# EAGLE board WS2811_Extender_V1.1_X12 (EAGLE 9.5.2), part 1 of 3
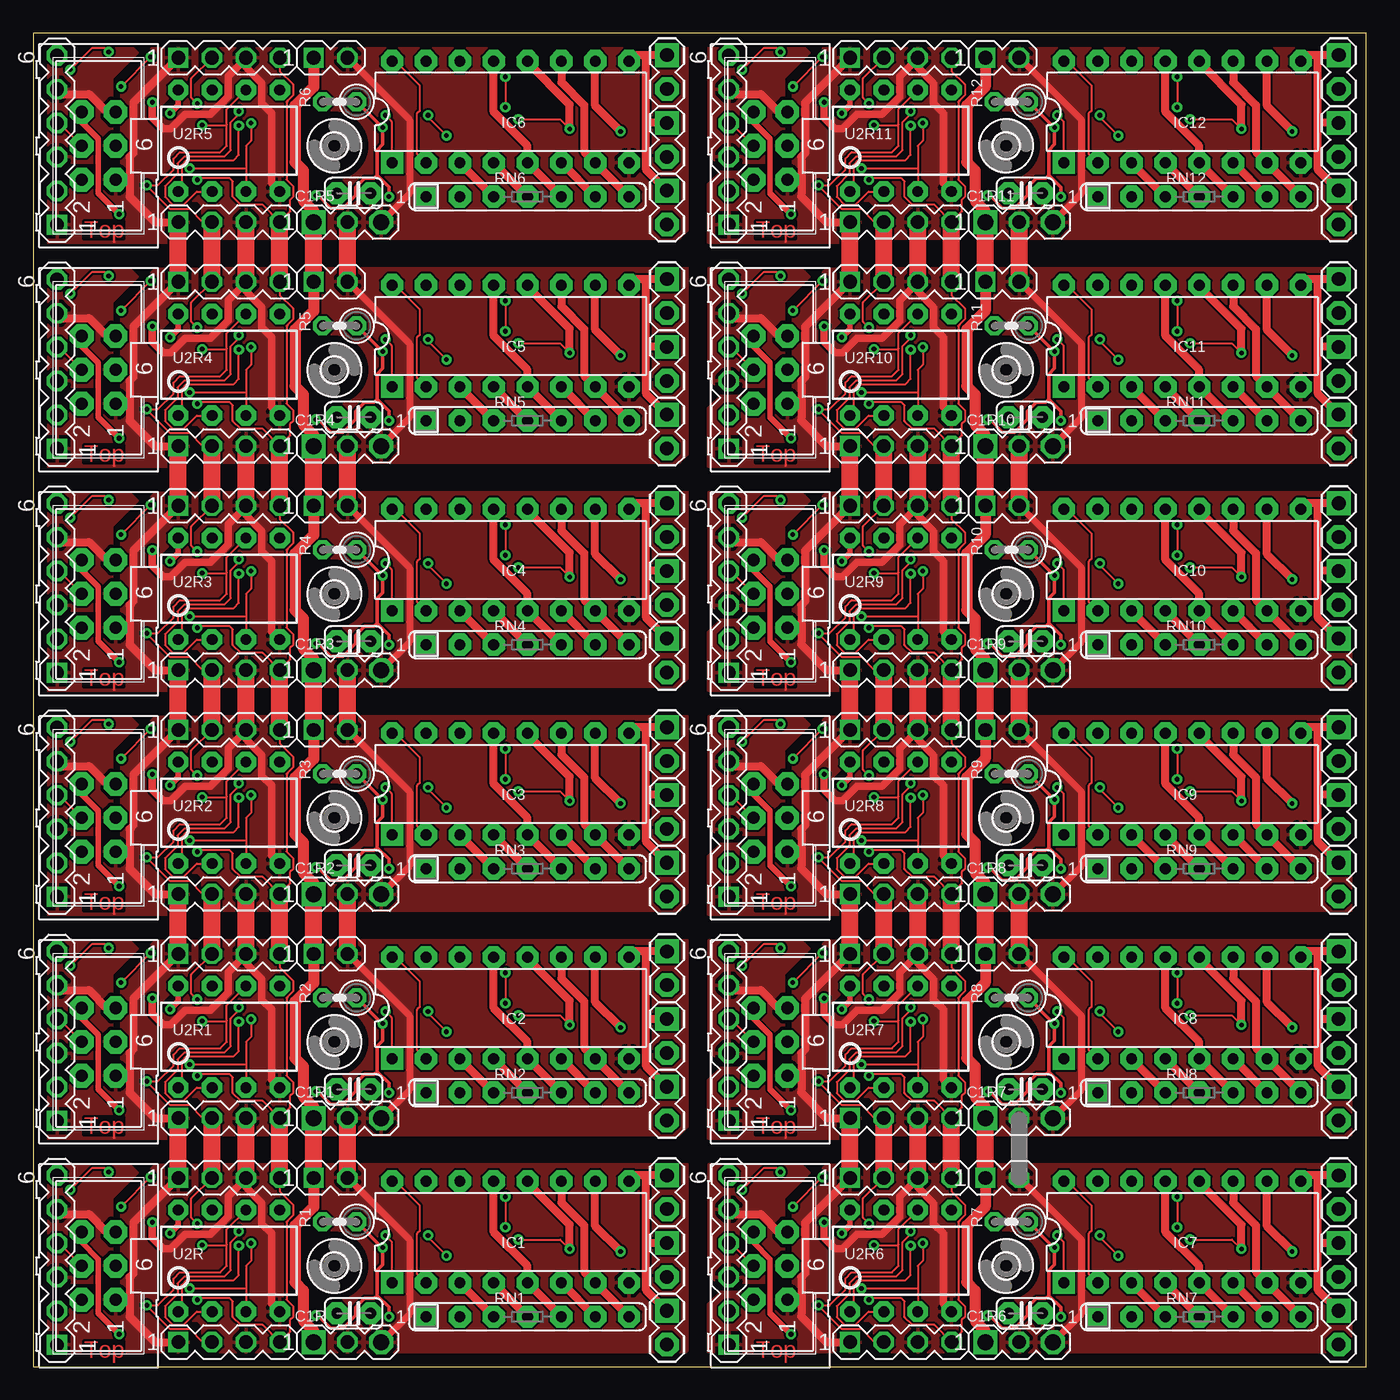
[diagram p0: board, top side]
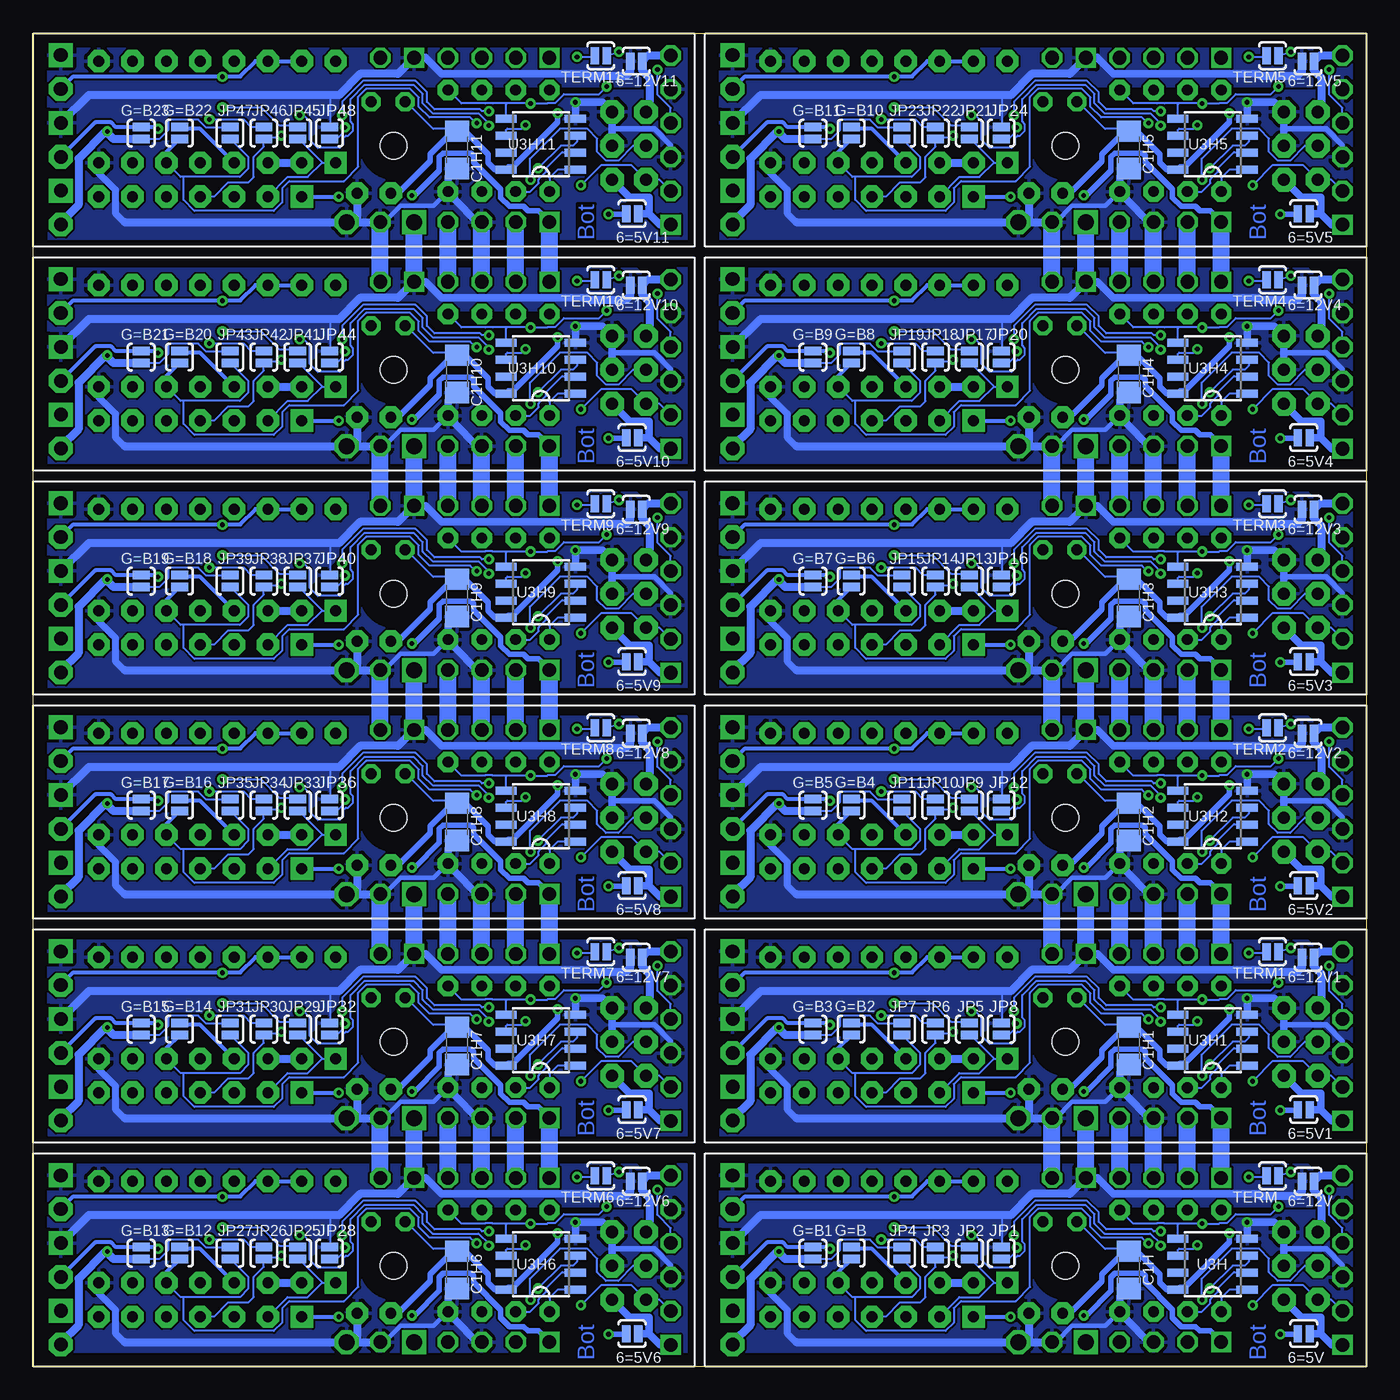
[diagram p1: board, bottom side, seen from below]

Size 100 x 100 mm. Coordinates in mm from the lower left corner, seen from the top.
Outline: 0,0 100,0
Outline: 0,15.99 0,0
Outline: 0,32.79 0,16.8
Outline: 0,49.59 0,33.6
Outline: 0,66.39 0,50.4
Outline: 0,83.19 0,67.2
Outline: 100,100 0,100 0,0
Outline: 50.4,0 100,0
Outline: 100,0 100,15.99
Outline: 100,16.8 100,32.79
Outline: 100,33.6 100,49.59
Outline: 100,50.4 100,66.39
Outline: 100,67.2 100,83.19
Outline: 100,0 100,100
Outline: 100,100 50.4,100
Copper layers (1*16): Top 0.035mm / dielectric 1.5mm / Bottom 0.035mm
Design rules "default": minimum track width 6mil, minimum drill 0.35mm, track to track 6mil, track to pad 6mil, pad to pad 6mil, via to via 6mil, smd to smd 6mil, copper to edge 40mil, drill to drill 6mil, minimum pad ring 10mil, minimum via ring 8mil, stop-mask expansion 4mil, vias tented up to drill 0mil, thermal gap 10mil

## Footprints (pad centres in the part's own frame; a part is rotated, then mirrored left to right if it is on the bottom)
SJ_2S-NO = smd 0.635 x 1.27: 1 -0.45,0; 2 0.45,0
C1206 = smd 1.6 x 1.8: 1 -1.4,0; 2 1.4,0
C025-024X044 = drill 0.813 pad 1.676 octagon: 1 -1.27,0; 2 1.27,0
2,0 = hole 2: 0,0
DIL16 = drill 0.813 pad 1.676 square: 1 -8.89,-3.81 | drill 0.813 pad 1.676 octagon: 2 -6.35,-3.81; 3 -3.81,-3.81; 4 -1.27,-3.81; 5 1.27,-3.81; 6 3.81,-3.81; 7 6.35,-3.81; 8 8.89,-3.81; 9 8.89,3.81; 10 6.35,3.81; 11 3.81,3.81; 12 1.27,3.81; 13 -1.27,3.81; 14 -3.81,3.81; 15 -6.35,3.81; 16 -8.89,3.81
1X02 = drill 1.016 pad 1.778 square: 1 0,0 | drill 1.016 pad 1.778 octagon: 2 2.54,0
ML6 = drill 0.914 pad 1.778 octagon: 1 -2.54,-1.27; 2 -2.54,1.27; 3 0,-1.27; 4 0,1.27; 5 2.54,-1.27; 6 2.54,1.27
RCL_0207/2V = drill 0.813 pad 1.422 octagon: 1 -1.27,0; 2 1.27,0
SIL7 = drill 0.813 pad 1.676 square: 1 -7.62,0 | drill 0.813 pad 1.676 octagon: 2 -5.08,0; 3 -2.54,0; 4 0,0; 5 2.54,0; 6 5.08,0; 7 7.62,0
MA02-1 = drill 1.016 pad 1.524 square: 1 -1.27,0 | drill 1.016 pad 1.524 octagon: 2 1.27,0
MA06-1 = drill 1.016 pad 1.524 square: 1 -6.35,0 | drill 1.016 pad 1.524 octagon: 2 -3.81,0; 3 -1.27,0; 4 1.27,0; 5 3.81,0; 6 6.35,0
MA04-1 = drill 1.016 pad 1.524 square: 1 -3.81,0 | drill 1.016 pad 1.524 octagon: 2 -1.27,0; 3 1.27,0; 4 3.81,0
MA03-1 = drill 1.2 square: 1 -3.81,0 | drill 1.016 pad 1.524 octagon: 2 -1.27,0 | drill 1.2 octagon: 3 1.27,0
S3PO_MODUL_WS2811_SOUND_MP3-TF-16P_WS2811_AND_ATTINY_WS2811_DIP08 = drill 0.813 pad 1.524 octagon: 1 -3.81,-3.81; 2 -1.27,-3.81; 3 1.27,-3.81; 4 3.81,-3.81; 5 3.81,3.81; 6 1.27,3.81; 7 -1.27,3.81; 8 -3.81,3.81
SOP8 = smd 0.6 x 1.6: 1 -1.905,-2.6; 2 -0.635,-2.6; 3 0.635,-2.6; 4 1.905,-2.6; 5 1.905,2.6; 6 0.635,2.6; 7 -0.635,2.6; 8 -1.905,2.6

## Placement (x,y rotation side)
6=5V  SOLDERJUMPERNO  [SJ_2S-NO]  4.68,2.48 0 bottom
6=5V1  SOLDERJUMPERNO  [SJ_2S-NO]  4.68,19.28 0 bottom
6=5V2  SOLDERJUMPERNO  [SJ_2S-NO]  4.68,36.08 0 bottom
6=5V3  SOLDERJUMPERNO  [SJ_2S-NO]  4.68,52.88 0 bottom
6=5V4  SOLDERJUMPERNO  [SJ_2S-NO]  4.68,69.68 0 bottom
6=5V5  SOLDERJUMPERNO  [SJ_2S-NO]  4.68,86.48 0 bottom
6=5V6  SOLDERJUMPERNO  [SJ_2S-NO]  55.08,2.48 0 bottom
6=5V7  SOLDERJUMPERNO  [SJ_2S-NO]  55.08,19.28 0 bottom
6=5V8  SOLDERJUMPERNO  [SJ_2S-NO]  55.08,36.08 0 bottom
6=5V9  SOLDERJUMPERNO  [SJ_2S-NO]  55.08,52.88 0 bottom
6=5V10  SOLDERJUMPERNO  [SJ_2S-NO]  55.08,69.68 0 bottom
6=5V11  SOLDERJUMPERNO  [SJ_2S-NO]  55.08,86.48 0 bottom
6=12V  SOLDERJUMPERNO  [SJ_2S-NO]  4.36,13.9 180 bottom
6=12V1  SOLDERJUMPERNO  [SJ_2S-NO]  4.36,30.71 180 bottom
6=12V2  SOLDERJUMPERNO  [SJ_2S-NO]  4.36,47.51 180 bottom
6=12V3  SOLDERJUMPERNO  [SJ_2S-NO]  4.36,64.31 180 bottom
6=12V4  SOLDERJUMPERNO  [SJ_2S-NO]  4.36,81.11 180 bottom
6=12V5  SOLDERJUMPERNO  [SJ_2S-NO]  4.36,97.91 180 bottom
6=12V6  SOLDERJUMPERNO  [SJ_2S-NO]  54.76,13.9 180 bottom
6=12V7  SOLDERJUMPERNO  [SJ_2S-NO]  54.76,30.71 180 bottom
6=12V8  SOLDERJUMPERNO  [SJ_2S-NO]  54.76,47.51 180 bottom
6=12V9  SOLDERJUMPERNO  [SJ_2S-NO]  54.76,64.31 180 bottom
6=12V10  SOLDERJUMPERNO  [SJ_2S-NO]  54.76,81.11 180 bottom
6=12V11  SOLDERJUMPERNO  [SJ_2S-NO]  54.76,97.91 180 bottom
C1H  100n  [C1206]  17.81,7.25 270 bottom
C1H1  100n  [C1206]  17.81,24.05 270 bottom
C1H2  100n  [C1206]  17.81,40.85 270 bottom
C1H3  100n  [C1206]  17.81,57.65 270 bottom
C1H4  100n  [C1206]  17.81,74.45 270 bottom
C1H5  100n  [C1206]  17.81,91.26 270 bottom
C1H6  100n  [C1206]  68.21,7.25 270 bottom
C1H7  100n  [C1206]  68.21,24.05 270 bottom
C1H8  100n  [C1206]  68.21,40.85 270 bottom
C1H9  100n  [C1206]  68.21,57.65 270 bottom
C1H10  100n  [C1206]  68.21,74.45 270 bottom
C1H11  100n  [C1206]  68.21,91.26 270 bottom
C1R  100n  [C025-024X044]  24.04,4 0 top
C1R1  100n  [C025-024X044]  24.04,20.8 0 top
C1R2  100n  [C025-024X044]  24.04,37.6 0 top
C1R3  100n  [C025-024X044]  24.04,54.4 0 top
C1R4  100n  [C025-024X044]  24.04,71.2 0 top
C1R5  100n  [C025-024X044]  24.04,88 0 top
C1R6  100n  [C025-024X044]  74.44,4 0 top
C1R7  100n  [C025-024X044]  74.44,20.8 0 top
C1R8  100n  [C025-024X044]  74.44,37.6 0 top
C1R9  100n  [C025-024X044]  74.44,54.4 0 top
C1R10  100n  [C025-024X044]  74.44,71.2 0 top
C1R11  100n  [C025-024X044]  74.44,88 0 top
G=B  SOLDERJUMPERNO  [SJ_2S-NO]  38.63,8.52 270 bottom
G=B1  SOLDERJUMPERNO  [SJ_2S-NO]  41.51,8.51 90 bottom
G=B2  SOLDERJUMPERNO  [SJ_2S-NO]  38.63,25.32 270 bottom
G=B3  SOLDERJUMPERNO  [SJ_2S-NO]  41.51,25.31 90 bottom
G=B4  SOLDERJUMPERNO  [SJ_2S-NO]  38.63,42.12 270 bottom
G=B5  SOLDERJUMPERNO  [SJ_2S-NO]  41.51,42.11 90 bottom
G=B6  SOLDERJUMPERNO  [SJ_2S-NO]  38.63,58.92 270 bottom
G=B7  SOLDERJUMPERNO  [SJ_2S-NO]  41.51,58.91 90 bottom
G=B8  SOLDERJUMPERNO  [SJ_2S-NO]  38.63,75.72 270 bottom
G=B9  SOLDERJUMPERNO  [SJ_2S-NO]  41.51,75.71 90 bottom
G=B10  SOLDERJUMPERNO  [SJ_2S-NO]  38.63,92.53 270 bottom
G=B11  SOLDERJUMPERNO  [SJ_2S-NO]  41.51,92.51 90 bottom
G=B12  SOLDERJUMPERNO  [SJ_2S-NO]  89.03,8.52 270 bottom
G=B13  SOLDERJUMPERNO  [SJ_2S-NO]  91.91,8.51 90 bottom
G=B14  SOLDERJUMPERNO  [SJ_2S-NO]  89.03,25.32 270 bottom
G=B15  SOLDERJUMPERNO  [SJ_2S-NO]  91.91,25.31 90 bottom
G=B16  SOLDERJUMPERNO  [SJ_2S-NO]  89.03,42.12 270 bottom
G=B17  SOLDERJUMPERNO  [SJ_2S-NO]  91.91,42.11 90 bottom
G=B18  SOLDERJUMPERNO  [SJ_2S-NO]  89.03,58.92 270 bottom
G=B19  SOLDERJUMPERNO  [SJ_2S-NO]  91.91,58.91 90 bottom
G=B20  SOLDERJUMPERNO  [SJ_2S-NO]  89.03,75.72 270 bottom
G=B21  SOLDERJUMPERNO  [SJ_2S-NO]  91.91,75.71 90 bottom
G=B22  SOLDERJUMPERNO  [SJ_2S-NO]  89.03,92.53 270 bottom
G=B23  SOLDERJUMPERNO  [SJ_2S-NO]  91.91,92.51 90 bottom
H1  MOUNT-HOLE2.0  [2,0]  22.59,7.55 0 top
H2  MOUNT-HOLE2.0  [2,0]  22.59,24.36 0 top
H3  MOUNT-HOLE2.0  [2,0]  22.59,41.16 0 top
H4  MOUNT-HOLE2.0  [2,0]  22.59,57.96 0 top
H5  MOUNT-HOLE2.0  [2,0]  22.59,74.76 0 top
H6  MOUNT-HOLE2.0  [2,0]  22.59,91.56 0 top
H7  MOUNT-HOLE2.0  [2,0]  72.99,7.55 0 top
H8  MOUNT-HOLE2.0  [2,0]  72.99,24.36 0 top
H9  MOUNT-HOLE2.0  [2,0]  72.99,41.16 0 top
H10  MOUNT-HOLE2.0  [2,0]  72.99,57.96 0 top
H11  MOUNT-HOLE2.0  [2,0]  72.99,74.76 0 top
H12  MOUNT-HOLE2.0  [2,0]  72.99,91.56 0 top
IC1  ULN2003AN  [DIL16]  35.81,10.1 0 top
IC2  ULN2003AN  [DIL16]  35.81,26.9 0 top
IC3  ULN2003AN  [DIL16]  35.81,43.7 0 top
IC4  ULN2003AN  [DIL16]  35.81,60.5 0 top
IC5  ULN2003AN  [DIL16]  35.81,77.3 0 top
IC6  ULN2003AN  [DIL16]  35.81,94.1 0 top
IC7  ULN2003AN  [DIL16]  86.21,10.1 0 top
IC8  ULN2003AN  [DIL16]  86.21,26.9 0 top
IC9  ULN2003AN  [DIL16]  86.21,43.7 0 top
IC10  ULN2003AN  [DIL16]  86.21,60.5 0 top
IC11  ULN2003AN  [DIL16]  86.21,77.3 0 top
IC12  ULN2003AN  [DIL16]  86.21,94.1 0 top
J1  Out2  [1X02]  47.54,9.27 270 top
J2  Out3  [1X02]  47.54,4.19 270 top
J3  Out1  [1X02]  47.54,31.15 270 top
J4  Out1  [1X02]  47.54,14.35 270 top
J5  Out2  [1X02]  47.54,26.07 270 top
J6  Out3  [1X02]  47.54,20.99 270 top
J7  Out1  [1X02]  47.54,47.95 270 top
J8  Out2  [1X02]  47.54,42.87 270 top
J9  Out3  [1X02]  47.54,37.79 270 top
J10  Out1  [1X02]  47.54,64.75 270 top
J11  Out2  [1X02]  47.54,59.67 270 top
J12  Out3  [1X02]  47.54,54.59 270 top
J13  Out1  [1X02]  47.54,81.55 270 top
J14  Out2  [1X02]  47.54,76.47 270 top
J15  Out3  [1X02]  47.54,71.39 270 top
J16  Out1  [1X02]  47.54,98.35 270 top
J17  Out2  [1X02]  47.54,93.27 270 top
J18  Out3  [1X02]  47.54,88.19 270 top
J19  Out1  [1X02]  97.94,14.35 270 top
J20  Out2  [1X02]  97.93,9.27 270 top
J21  Out3  [1X02]  97.93,4.19 270 top
J22  Out1  [1X02]  97.94,31.15 270 top
J23  Out2  [1X02]  97.93,26.07 270 top
J24  Out3  [1X02]  97.93,20.99 270 top
J25  Out1  [1X02]  97.94,47.95 270 top
J26  Out2  [1X02]  97.93,42.87 270 top
J27  Out3  [1X02]  97.93,37.79 270 top
J28  Out1  [1X02]  97.94,64.75 270 top
J29  Out2  [1X02]  97.93,59.67 270 top
J30  Out3  [1X02]  97.93,54.59 270 top
J31  Out1  [1X02]  97.94,81.55 270 top
J32  Out2  [1X02]  97.93,76.47 270 top
J33  Out3  [1X02]  97.93,71.39 270 top
J34  Out1  [1X02]  97.94,98.35 270 top
J35  Out2  [1X02]  97.93,93.27 270 top
J36  Out3  [1X02]  97.93,88.19 270 top
JP1  SOLDERJUMPERNO  [SJ_2S-NO]  27.38,8.51 90 bottom
JP2  SOLDERJUMPERNO  [SJ_2S-NO]  29.76,8.51 90 bottom
JP3  SOLDERJUMPERNO  [SJ_2S-NO]  32.3,8.51 90 bottom
JP4  SOLDERJUMPERNO  [SJ_2S-NO]  34.84,8.51 90 bottom
JP5  SOLDERJUMPERNO  [SJ_2S-NO]  29.76,25.31 90 bottom
JP6  SOLDERJUMPERNO  [SJ_2S-NO]  32.3,25.31 90 bottom
JP7  SOLDERJUMPERNO  [SJ_2S-NO]  34.84,25.31 90 bottom
JP8  SOLDERJUMPERNO  [SJ_2S-NO]  27.38,25.31 90 bottom
JP9  SOLDERJUMPERNO  [SJ_2S-NO]  29.76,42.11 90 bottom
JP10  SOLDERJUMPERNO  [SJ_2S-NO]  32.3,42.11 90 bottom
JP11  SOLDERJUMPERNO  [SJ_2S-NO]  34.84,42.11 90 bottom
JP12  SOLDERJUMPERNO  [SJ_2S-NO]  27.38,42.11 90 bottom
JP13  SOLDERJUMPERNO  [SJ_2S-NO]  29.76,58.91 90 bottom
JP14  SOLDERJUMPERNO  [SJ_2S-NO]  32.3,58.91 90 bottom
JP15  SOLDERJUMPERNO  [SJ_2S-NO]  34.84,58.91 90 bottom
JP16  SOLDERJUMPERNO  [SJ_2S-NO]  27.38,58.91 90 bottom
JP17  SOLDERJUMPERNO  [SJ_2S-NO]  29.76,75.71 90 bottom
JP18  SOLDERJUMPERNO  [SJ_2S-NO]  32.3,75.71 90 bottom
JP19  SOLDERJUMPERNO  [SJ_2S-NO]  34.84,75.71 90 bottom
JP20  SOLDERJUMPERNO  [SJ_2S-NO]  27.38,75.71 90 bottom
JP21  SOLDERJUMPERNO  [SJ_2S-NO]  29.76,92.51 90 bottom
JP22  SOLDERJUMPERNO  [SJ_2S-NO]  32.3,92.51 90 bottom
JP23  SOLDERJUMPERNO  [SJ_2S-NO]  34.84,92.51 90 bottom
JP24  SOLDERJUMPERNO  [SJ_2S-NO]  27.38,92.51 90 bottom
JP25  SOLDERJUMPERNO  [SJ_2S-NO]  80.16,8.51 90 bottom
JP26  SOLDERJUMPERNO  [SJ_2S-NO]  82.7,8.51 90 bottom
JP27  SOLDERJUMPERNO  [SJ_2S-NO]  85.24,8.51 90 bottom
JP28  SOLDERJUMPERNO  [SJ_2S-NO]  77.78,8.51 90 bottom
JP29  SOLDERJUMPERNO  [SJ_2S-NO]  80.16,25.31 90 bottom
JP30  SOLDERJUMPERNO  [SJ_2S-NO]  82.7,25.31 90 bottom
JP31  SOLDERJUMPERNO  [SJ_2S-NO]  85.24,25.31 90 bottom
JP32  SOLDERJUMPERNO  [SJ_2S-NO]  77.78,25.31 90 bottom
JP33  SOLDERJUMPERNO  [SJ_2S-NO]  80.16,42.11 90 bottom
JP34  SOLDERJUMPERNO  [SJ_2S-NO]  82.7,42.11 90 bottom
JP35  SOLDERJUMPERNO  [SJ_2S-NO]  85.24,42.11 90 bottom
JP36  SOLDERJUMPERNO  [SJ_2S-NO]  77.78,42.11 90 bottom
JP37  SOLDERJUMPERNO  [SJ_2S-NO]  80.16,58.91 90 bottom
JP38  SOLDERJUMPERNO  [SJ_2S-NO]  82.7,58.91 90 bottom
JP39  SOLDERJUMPERNO  [SJ_2S-NO]  85.24,58.91 90 bottom
JP40  SOLDERJUMPERNO  [SJ_2S-NO]  77.78,58.91 90 bottom
JP41  SOLDERJUMPERNO  [SJ_2S-NO]  80.16,75.71 90 bottom
JP42  SOLDERJUMPERNO  [SJ_2S-NO]  82.7,75.71 90 bottom
JP43  SOLDERJUMPERNO  [SJ_2S-NO]  85.24,75.71 90 bottom
JP44  SOLDERJUMPERNO  [SJ_2S-NO]  77.78,75.71 90 bottom
JP45  SOLDERJUMPERNO  [SJ_2S-NO]  80.16,92.51 90 bottom
JP46  SOLDERJUMPERNO  [SJ_2S-NO]  82.7,92.51 90 bottom
JP47  SOLDERJUMPERNO  [SJ_2S-NO]  85.24,92.51 90 bottom
JP48  SOLDERJUMPERNO  [SJ_2S-NO]  77.78,92.51 90 bottom
O1  [ML6]  4.9,7.55 90 top
O2  [ML6]  4.9,24.36 90 top
O3  [ML6]  4.9,41.16 90 top
O4  [ML6]  4.9,57.96 90 top
O5  [ML6]  4.9,74.76 90 top
O6  [ML6]  4.9,91.56 90 top
O7  [ML6]  55.3,7.55 90 top
O8  [ML6]  55.3,24.36 90 top
O9  [ML6]  55.3,41.16 90 top
O10  [ML6]  55.3,57.96 90 top
O11  [ML6]  55.3,74.76 90 top
O12  [ML6]  55.3,91.56 90 top
R1  150  [RCL_0207/2V]  22.98,10.86 180 top
R2  150  [RCL_0207/2V]  22.98,27.66 180 top
R3  150  [RCL_0207/2V]  22.98,44.46 180 top
R4  150  [RCL_0207/2V]  22.98,61.26 180 top
R5  150  [RCL_0207/2V]  22.98,78.06 180 top
R6  150  [RCL_0207/2V]  22.98,94.86 180 top
R7  150  [RCL_0207/2V]  73.38,10.86 180 top
R8  150  [RCL_0207/2V]  73.38,27.66 180 top
R9  150  [RCL_0207/2V]  73.38,44.46 180 top
R10  150  [RCL_0207/2V]  73.38,61.26 180 top
R11  150  [RCL_0207/2V]  73.38,78.06 180 top
R12  150  [RCL_0207/2V]  73.38,94.86 180 top
RN1  1K  [SIL7]  37.08,3.75 0 top
RN2  1K  [SIL7]  37.08,20.55 0 top
RN3  1K  [SIL7]  37.08,37.35 0 top
RN4  1K  [SIL7]  37.08,54.15 0 top
RN5  1K  [SIL7]  37.08,70.95 0 top
RN6  1K  [SIL7]  37.08,87.75 0 top
RN7  1K  [SIL7]  87.48,3.75 0 top
RN8  1K  [SIL7]  87.48,20.55 0 top
RN9  1K  [SIL7]  87.48,37.35 0 top
RN10  1K  [SIL7]  87.48,54.15 0 top
RN11  1K  [SIL7]  87.48,70.95 0 top
RN12  1K  [SIL7]  87.48,87.75 0 top
SV1  [MA02-1]  22.3,14.16 0 top
SV2  [MA06-1]  1.78,7.99 90 top
SV3  [MA04-1]  14.68,14.16 0 top
SV4  [MA04-1]  14.68,1.84 0 top
SV5  [MA04-1]  14.68,30.96 0 top
SV6  [MA03-1]  24.84,1.84 0 top
SV7  [MA04-1]  14.68,18.64 0 top
SV8  [MA02-1]  22.3,30.96 0 top
SV9  [MA03-1]  24.84,18.64 0 top
SV10  [MA06-1]  1.78,24.79 90 top
SV11  [MA04-1]  14.68,47.76 0 top
SV12  [MA04-1]  14.68,35.44 0 top
SV13  [MA02-1]  22.3,47.76 0 top
SV14  [MA03-1]  24.84,35.44 0 top
SV15  [MA06-1]  1.78,41.59 90 top
SV16  [MA04-1]  14.68,64.56 0 top
SV17  [MA04-1]  14.68,52.24 0 top
SV18  [MA02-1]  22.3,64.56 0 top
SV19  [MA03-1]  24.84,52.24 0 top
SV20  [MA06-1]  1.78,58.39 90 top
SV21  [MA04-1]  14.68,81.36 0 top
SV22  [MA04-1]  14.68,69.04 0 top
SV23  [MA02-1]  22.3,81.36 0 top
SV24  [MA03-1]  24.84,69.04 0 top
SV25  [MA06-1]  1.78,75.19 90 top
SV26  [MA04-1]  14.68,98.17 0 top
SV27  [MA04-1]  14.68,85.85 0 top
SV28  [MA02-1]  22.3,98.17 0 top
SV29  [MA03-1]  24.84,85.85 0 top
SV30  [MA06-1]  1.78,91.99 90 top
SV31  [MA04-1]  65.08,14.16 0 top
SV32  [MA04-1]  65.08,1.84 0 top
SV33  [MA02-1]  72.7,14.16 0 top
SV34  [MA03-1]  75.24,1.84 0 top
SV35  [MA06-1]  52.18,7.99 90 top
SV36  [MA04-1]  65.08,30.96 0 top
SV37  [MA04-1]  65.08,18.64 0 top
SV38  [MA02-1]  72.7,30.96 0 top
SV39  [MA03-1]  75.24,18.64 0 top
SV40  [MA06-1]  52.18,24.79 90 top
SV41  [MA04-1]  65.08,47.76 0 top
SV42  [MA04-1]  65.08,35.44 0 top
SV43  [MA02-1]  72.7,47.76 0 top
SV44  [MA03-1]  75.24,35.44 0 top
SV45  [MA06-1]  52.18,41.59 90 top
SV46  [MA04-1]  65.08,64.56 0 top
SV47  [MA04-1]  65.08,52.24 0 top
SV48  [MA02-1]  72.7,64.56 0 top
SV49  [MA03-1]  75.24,52.24 0 top
SV50  [MA06-1]  52.18,58.39 90 top
SV51  [MA04-1]  65.08,81.36 0 top
SV52  [MA04-1]  65.08,69.04 0 top
SV53  [MA02-1]  72.7,81.36 0 top
SV54  [MA03-1]  75.24,69.04 0 top
SV55  [MA06-1]  52.18,75.19 90 top
SV56  [MA04-1]  65.08,98.17 0 top
SV57  [MA04-1]  65.08,85.85 0 top
SV58  [MA02-1]  72.7,98.17 0 top
SV59  [MA03-1]  75.24,85.85 0 top
SV60  [MA06-1]  52.18,91.99 90 top
TERM  SOLDERJUMPERNO  [SJ_2S-NO]  7.03,14.31 180 bottom
TERM1  SOLDERJUMPERNO  [SJ_2S-NO]  7.03,31.11 180 bottom
TERM2  SOLDERJUMPERNO  [SJ_2S-NO]  7.03,47.91 180 bottom
TERM3  SOLDERJUMPERNO  [SJ_2S-NO]  7.03,64.71 180 bottom
TERM4  SOLDERJUMPERNO  [SJ_2S-NO]  7.03,81.52 180 bottom
TERM5  SOLDERJUMPERNO  [SJ_2S-NO]  7.03,98.32 180 bottom
TERM6  SOLDERJUMPERNO  [SJ_2S-NO]  57.43,14.31 180 bottom
TERM7  SOLDERJUMPERNO  [SJ_2S-NO]  57.43,31.11 180 bottom
TERM8  SOLDERJUMPERNO  [SJ_2S-NO]  57.43,47.91 180 bottom
TERM9  SOLDERJUMPERNO  [SJ_2S-NO]  57.43,64.71 180 bottom
TERM10  SOLDERJUMPERNO  [SJ_2S-NO]  57.43,81.52 180 bottom
TERM11  SOLDERJUMPERNO  [SJ_2S-NO]  57.43,98.32 180 bottom
U2R  TINY45-20-DIP  [S3PO_MODUL_WS2811_SOUND_MP3-TF-16P_WS2811_AND_ATTINY_WS2811_DIP08]  14.68,7.94 0 top
U2R1  TINY45-20-DIP  [S3PO_MODUL_WS2811_SOUND_MP3-TF-16P_WS2811_AND_ATTINY_WS2811_DIP08]  14.68,24.74 0 top
U2R2  TINY45-20-DIP  [S3PO_MODUL_WS2811_SOUND_MP3-TF-16P_WS2811_AND_ATTINY_WS2811_DIP08]  14.68,41.54 0 top
U2R3  TINY45-20-DIP  [S3PO_MODUL_WS2811_SOUND_MP3-TF-16P_WS2811_AND_ATTINY_WS2811_DIP08]  14.68,58.34 0 top
U2R4  TINY45-20-DIP  [S3PO_MODUL_WS2811_SOUND_MP3-TF-16P_WS2811_AND_ATTINY_WS2811_DIP08]  14.68,75.14 0 top
U2R5  TINY45-20-DIP  [S3PO_MODUL_WS2811_SOUND_MP3-TF-16P_WS2811_AND_ATTINY_WS2811_DIP08]  14.68,91.94 0 top
U2R6  TINY45-20-DIP  [S3PO_MODUL_WS2811_SOUND_MP3-TF-16P_WS2811_AND_ATTINY_WS2811_DIP08]  65.08,7.94 0 top
U2R7  TINY45-20-DIP  [S3PO_MODUL_WS2811_SOUND_MP3-TF-16P_WS2811_AND_ATTINY_WS2811_DIP08]  65.08,24.74 0 top
U2R8  TINY45-20-DIP  [S3PO_MODUL_WS2811_SOUND_MP3-TF-16P_WS2811_AND_ATTINY_WS2811_DIP08]  65.08,41.54 0 top
U2R9  TINY45-20-DIP  [S3PO_MODUL_WS2811_SOUND_MP3-TF-16P_WS2811_AND_ATTINY_WS2811_DIP08]  65.08,58.34 0 top
U2R10  TINY45-20-DIP  [S3PO_MODUL_WS2811_SOUND_MP3-TF-16P_WS2811_AND_ATTINY_WS2811_DIP08]  65.08,75.14 0 top
U2R11  TINY45-20-DIP  [S3PO_MODUL_WS2811_SOUND_MP3-TF-16P_WS2811_AND_ATTINY_WS2811_DIP08]  65.08,91.94 0 top
U3H  WS2811 SOT-8  [SOP8]  11.53,7.68 90 bottom
U3H1  WS2811 SOT-8  [SOP8]  11.53,24.48 90 bottom
U3H2  WS2811 SOT-8  [SOP8]  11.53,41.28 90 bottom
U3H3  WS2811 SOT-8  [SOP8]  11.53,58.09 90 bottom
U3H4  WS2811 SOT-8  [SOP8]  11.53,74.89 90 bottom
U3H5  WS2811 SOT-8  [SOP8]  11.53,91.69 90 bottom
U3H6  WS2811 SOT-8  [SOP8]  61.93,7.68 90 bottom
U3H7  WS2811 SOT-8  [SOP8]  61.93,24.48 90 bottom
U3H8  WS2811 SOT-8  [SOP8]  61.93,41.28 90 bottom
U3H9  WS2811 SOT-8  [SOP8]  61.93,58.09 90 bottom
U3H10  WS2811 SOT-8  [SOP8]  61.93,74.89 90 bottom
U3H11  WS2811 SOT-8  [SOP8]  61.93,91.69 90 bottom

## Library data of the parts
6=5V 6=5V1-6=5V11 6=12V 6=12V1-6=12V11 G=B G=B1-G=B23 JP1-JP48 TERM TERM1-TERM11 = SparkFun-Retired
C1H C1H1-C1H11 C1R C1R1-C1R11 = rcl; SPICEPREFIX: C
H1-H12 = holes
IC1-IC12 = uln-udn; REICHELT: ULN 2003A STM; REICHELT_EU: 0,22 €; REICHELT_LNK: https://www.reichelt.de/seven-darlington-arrays-dip-16-uln-2003a-stm-p216685.html?&trstct=pos_0
J1-J36 = SparkFun-Connectors
O1-O12 = con-harting-ml; OC_FARNELL: unknown; OC_NEWARK: unknown
R1-R12 = Sound_MP3-TF-16P_and_WS2811; SPICEPREFIX: R
RN1-RN12 = resistor-sil; OC_FARNELL: unknown; OC_NEWARK: unknown; REICHELT: SIL 7-6 1,0K; REICHELT_EU: 0,071 €; REICHELT_LNK: https://www.reichelt.de/widerstandsnetzwerk-1-0-kohm-sternschaltung-6wid-7pins-sil-7-6-1-0k-p17841.html?&trstct=pol_1
SV1 SV3-SV9 SV11-SV14 SV16-SV19 SV21-SV24 SV26-SV29 SV31-SV34 SV36-SV39 SV41-SV44 SV46-SV49 SV51-SV54 SV56-SV59 = con-lstb
SV2 SV10 SV15 SV20 SV25 SV30 SV35 SV40 SV45 SV50 SV55 SV60 = con-lstb; OC_FARNELL: unknown; OC_NEWARK: unknown
U2R U2R1-U2R11 = S3PO_Modul_WS2811; PROD_ID: IC-09439
U3H U3H1-U3H11 = S3PO_Modul_WS2811

## Nets
12V: 6=12V.2 IC1.9 J1.1 J2.1 J4.1 JP1.2 SV1.1 SV6.1
12V1: 6=12V1.2 IC2.9 J3.1 J5.1 J6.1 JP8.2 SV8.1 SV9.1
12V2: 6=12V2.2 IC3.9 J7.1 J8.1 J9.1 JP12.2 SV13.1 SV14.1
12V3: 6=12V3.2 IC4.9 J10.1 J11.1 J12.1 JP16.2 SV18.1 SV19.1
12V4: 6=12V4.2 IC5.9 J13.1 J14.1 J15.1 JP20.2 SV23.1 SV24.1
12V5: 6=12V5.2 IC6.9 J16.1 J17.1 J18.1 JP24.2 SV28.1 SV29.1
12V6: 6=12V6.2 IC7.9 J19.1 J20.1 J21.1 JP28.2 SV33.1 SV34.1
12V7: 6=12V7.2 IC8.9 J22.1 J23.1 J24.1 JP32.2 SV38.1 SV39.1
12V8: 6=12V8.2 IC9.9 J25.1 J26.1 J27.1 JP36.2 SV43.1 SV44.1
12V9: 6=12V9.2 IC10.9 J28.1 J29.1 J30.1 JP40.2 SV48.1 SV49.1
12V10: 6=12V10.2 IC11.9 J31.1 J32.1 J33.1 JP44.2 SV53.1 SV54.1
12V11: 6=12V11.2 IC12.9 J34.1 J35.1 J36.1 JP48.2 SV58.1 SV59.1
+5V: 6=5V.2 JP1.1 O1.1 R1.1 RN1.1 SV2.1 SV3.1 SV4.1
+5V1: 6=5V1.2 JP8.1 O2.1 R2.1 RN2.1 SV5.1 SV7.1 SV10.1
+5V2: 6=5V2.2 JP12.1 O3.1 R3.1 RN3.1 SV11.1 SV12.1 SV15.1
+5V3: 6=5V3.2 JP16.1 O4.1 R4.1 RN4.1 SV16.1 SV17.1 SV20.1
+5V4: 6=5V4.2 JP20.1 O5.1 R5.1 RN5.1 SV21.1 SV22.1 SV25.1
+5V5: 6=5V5.2 JP24.1 O6.1 R6.1 RN6.1 SV26.1 SV27.1 SV30.1
+5V6: 6=5V6.2 JP28.1 O7.1 R7.1 RN7.1 SV31.1 SV32.1 SV35.1
+5V7: 6=5V7.2 JP32.1 O8.1 R8.1 RN8.1 SV36.1 SV37.1 SV40.1
+5V8: 6=5V8.2 JP36.1 O9.1 R9.1 RN9.1 SV41.1 SV42.1 SV45.1
+5V9: 6=5V9.2 JP40.1 O10.1 R10.1 RN10.1 SV46.1 SV47.1 SV50.1
+5V10: 6=5V10.2 JP44.1 O11.1 R11.1 RN11.1 SV51.1 SV52.1 SV55.1
+5V11: 6=5V11.2 JP48.1 O12.1 R12.1 RN12.1 SV56.1 SV57.1 SV60.1
GND: C1H.2 C1R.2 IC1.8 O1.3 O1.5 SV1.2 SV2.3 SV2.5 SV3.3 SV4.3 SV6.2 SV6.3 U2R.4 U3H.4
GND1: C1H1.2 C1R1.2 IC2.8 O2.3 O2.5 SV5.3 SV7.3 SV8.2 SV9.2 SV9.3 SV10.3 SV10.5 U2R1.4 U3H1.4
GND2: C1H2.2 C1R2.2 IC3.8 O3.3 O3.5 SV11.3 SV12.3 SV13.2 SV14.2 SV14.3 SV15.3 SV15.5 U2R2.4 U3H2.4
GND3: C1H3.2 C1R3.2 IC4.8 O4.3 O4.5 SV16.3 SV17.3 SV18.2 SV19.2 SV19.3 SV20.3 SV20.5 U2R3.4 U3H3.4
GND4: C1H4.2 C1R4.2 IC5.8 O5.3 O5.5 SV21.3 SV22.3 SV23.2 SV24.2 SV24.3 SV25.3 SV25.5 U2R4.4 U3H4.4
GND5: C1H5.2 C1R5.2 IC6.8 O6.3 O6.5 SV26.3 SV27.3 SV28.2 SV29.2 SV29.3 SV30.3 SV30.5 U2R5.4 U3H5.4
GND6: C1H6.2 C1R6.2 IC7.8 O7.3 O7.5 SV31.3 SV32.3 SV33.2 SV34.2 SV34.3 SV35.3 SV35.5 U2R6.4 U3H6.4
GND7: C1H7.2 C1R7.2 IC8.8 O8.3 O8.5 SV36.3 SV37.3 SV38.2 SV39.2 SV39.3 SV40.3 SV40.5 U2R7.4 U3H7.4
GND8: C1H8.2 C1R8.2 IC9.8 O9.3 O9.5 SV41.3 SV42.3 SV43.2 SV44.2 SV44.3 SV45.3 SV45.5 U2R8.4 U3H8.4
GND9: C1H9.2 C1R9.2 IC10.8 O10.3 O10.5 SV46.3 SV47.3 SV48.2 SV49.2 SV49.3 SV50.3 SV50.5 U2R9.4 U3H9.4
GND10: C1H10.2 C1R10.2 IC11.8 O11.3 O11.5 SV51.3 SV52.3 SV53.2 SV54.2 SV54.3 SV55.3 SV55.5 U2R10.4 U3H10.4
GND11: C1H11.2 C1R11.2 IC12.8 O12.3 O12.5 SV56.3 SV57.3 SV58.2 SV59.2 SV59.3 SV60.3 SV60.5 U2R11.4 U3H11.4
N$1: O1.2 SV2.2 SV4.2 U2R.6 U3H.6
N$2: SV3.2 TERM.2 U2R.5 U3H.5
N$3: O1.4 SV2.4 SV3.4 SV4.4 TERM.1
N$4: C1H.1 C1R.1 R1.2 U2R.8 U3H.8
N$5: IC1.1 JP2.1 RN1.2 U2R.2 U3H.2
N$6: 6=5V.1 6=12V.1 O1.6 SV2.6
N$7: O2.2 SV7.2 SV10.2 U2R1.6 U3H1.6
N$8: G=B.2 IC1.6 JP4.1 RN1.6 U2R.3 U3H.3
N$9: IC1.2 IC1.3 IC1.16 RN1.3
N$10: SV5.2 TERM1.2 U2R1.5 U3H1.5
N$11: IC1.5 IC1.13 RN1.5
N$12: IC1.7 IC1.11 RN1.7
N$13: O2.4 SV5.4 SV7.4 SV10.4 TERM1.1
N$14: C1H1.1 C1R1.1 R2.2 U2R1.8 U3H1.8
N$15: 6=5V1.1 6=12V1.1 O2.6 SV10.6
N$16: IC2.1 JP5.1 RN2.2 U2R1.2 U3H1.2
N$17: G=B2.2 IC2.6 JP7.1 RN2.6 U2R1.3 U3H1.3
N$18: G=B2.1 IC2.4 JP6.1 RN2.4 U2R1.1 U3H1.1
N$19: IC2.2 IC2.3 IC2.16 RN2.3
N$20: IC2.5 IC2.13 RN2.5
N$21: G=B.1 IC1.4 JP3.1 RN1.4 U2R.1 U3H.1
N$22: IC2.7 IC2.11 RN2.7
N$23: O3.2 SV12.2 SV15.2 U2R2.6 U3H2.6
N$24: SV11.2 TERM2.2 U2R2.5 U3H2.5
N$25: O3.4 SV11.4 SV12.4 SV15.4 TERM2.1
N$26: C1H2.1 C1R2.1 R3.2 U2R2.8 U3H2.8
N$27: 6=5V2.1 6=12V2.1 O3.6 SV15.6
N$28: IC3.1 JP9.1 RN3.2 U2R2.2 U3H2.2
N$29: G=B4.2 IC3.6 JP11.1 RN3.6 U2R2.3 U3H2.3
N$30: G=B4.1 IC3.4 JP10.1 RN3.4 U2R2.1 U3H2.1
N$31: IC3.2 IC3.3 IC3.16 RN3.3
N$32: IC3.5 IC3.13 RN3.5
N$33: IC3.7 IC3.11 RN3.7
N$34: O4.2 SV17.2 SV20.2 U2R3.6 U3H3.6
N$35: SV16.2 TERM3.2 U2R3.5 U3H3.5
N$36: O4.4 SV16.4 SV17.4 SV20.4 TERM3.1
N$37: C1H3.1 C1R3.1 R4.2 U2R3.8 U3H3.8
N$38: 6=5V3.1 6=12V3.1 O4.6 SV20.6
N$39: IC4.1 JP13.1 RN4.2 U2R3.2 U3H3.2
N$40: G=B6.2 IC4.6 JP15.1 RN4.6 U2R3.3 U3H3.3
N$41: G=B6.1 IC4.4 JP14.1 RN4.4 U2R3.1 U3H3.1
N$42: IC4.2 IC4.3 IC4.16 RN4.3
N$43: IC4.5 IC4.13 RN4.5
N$44: IC4.7 IC4.11 RN4.7
N$45: O5.2 SV22.2 SV25.2 U2R4.6 U3H4.6
N$46: SV21.2 TERM4.2 U2R4.5 U3H4.5
N$47: O5.4 SV21.4 SV22.4 SV25.4 TERM4.1
N$48: C1H4.1 C1R4.1 R5.2 U2R4.8 U3H4.8
N$49: 6=5V4.1 6=12V4.1 O5.6 SV25.6
N$50: IC5.1 JP17.1 RN5.2 U2R4.2 U3H4.2
N$51: G=B8.2 IC5.6 JP19.1 RN5.6 U2R4.3 U3H4.3
N$52: G=B8.1 IC5.4 JP18.1 RN5.4 U2R4.1 U3H4.1
N$53: IC5.2 IC5.3 IC5.16 RN5.3
N$54: IC5.5 IC5.13 RN5.5
N$55: IC5.7 IC5.11 RN5.7
N$56: O6.2 SV27.2 SV30.2 U2R5.6 U3H5.6
N$57: SV26.2 TERM5.2 U2R5.5 U3H5.5
N$58: O6.4 SV26.4 SV27.4 SV30.4 TERM5.1
N$59: C1H5.1 C1R5.1 R6.2 U2R5.8 U3H5.8
N$60: 6=5V5.1 6=12V5.1 O6.6 SV30.6
N$61: IC6.1 JP21.1 RN6.2 U2R5.2 U3H5.2
N$62: G=B10.2 IC6.6 JP23.1 RN6.6 U2R5.3 U3H5.3
N$63: G=B10.1 IC6.4 JP22.1 RN6.4 U2R5.1 U3H5.1
N$64: IC6.2 IC6.3 IC6.16 RN6.3
N$65: IC6.5 IC6.13 RN6.5
N$66: IC6.7 IC6.11 RN6.7
N$67: O7.2 SV32.2 SV35.2 U2R6.6 U3H6.6
N$68: SV31.2 TERM6.2 U2R6.5 U3H6.5
N$69: O7.4 SV31.4 SV32.4 SV35.4 TERM6.1
N$70: C1H6.1 C1R6.1 R7.2 U2R6.8 U3H6.8
N$71: 6=5V6.1 6=12V6.1 O7.6 SV35.6
N$72: IC7.1 JP25.1 RN7.2 U2R6.2 U3H6.2
N$73: G=B12.2 IC7.6 JP27.1 RN7.6 U2R6.3 U3H6.3
N$74: G=B12.1 IC7.4 JP26.1 RN7.4 U2R6.1 U3H6.1
N$75: IC7.2 IC7.3 IC7.16 RN7.3
N$76: IC7.5 IC7.13 RN7.5
N$77: IC7.7 IC7.11 RN7.7
N$78: O8.2 SV37.2 SV40.2 U2R7.6 U3H7.6
N$79: SV36.2 TERM7.2 U2R7.5 U3H7.5
N$80: O8.4 SV36.4 SV37.4 SV40.4 TERM7.1
N$81: C1H7.1 C1R7.1 R8.2 U2R7.8 U3H7.8
N$82: 6=5V7.1 6=12V7.1 O8.6 SV40.6
N$83: IC8.1 JP29.1 RN8.2 U2R7.2 U3H7.2
N$84: G=B14.2 IC8.6 JP31.1 RN8.6 U2R7.3 U3H7.3
N$85: G=B14.1 IC8.4 JP30.1 RN8.4 U2R7.1 U3H7.1
N$86: IC8.2 IC8.3 IC8.16 RN8.3
N$87: IC8.5 IC8.13 RN8.5
N$88: IC8.7 IC8.11 RN8.7
N$89: O9.2 SV42.2 SV45.2 U2R8.6 U3H8.6
N$90: SV41.2 TERM8.2 U2R8.5 U3H8.5
N$91: O9.4 SV41.4 SV42.4 SV45.4 TERM8.1
N$92: C1H8.1 C1R8.1 R9.2 U2R8.8 U3H8.8
N$93: 6=5V8.1 6=12V8.1 O9.6 SV45.6
N$94: IC9.1 JP33.1 RN9.2 U2R8.2 U3H8.2
N$95: G=B16.2 IC9.6 JP35.1 RN9.6 U2R8.3 U3H8.3
N$96: G=B16.1 IC9.4 JP34.1 RN9.4 U2R8.1 U3H8.1
N$97: IC9.2 IC9.3 IC9.16 RN9.3
N$98: IC9.5 IC9.13 RN9.5
N$99: IC9.7 IC9.11 RN9.7
N$100: O10.2 SV47.2 SV50.2 U2R9.6 U3H9.6
N$101: SV46.2 TERM9.2 U2R9.5 U3H9.5
N$102: O10.4 SV46.4 SV47.4 SV50.4 TERM9.1
N$103: C1H9.1 C1R9.1 R10.2 U2R9.8 U3H9.8
N$104: 6=5V9.1 6=12V9.1 O10.6 SV50.6
N$105: IC10.1 JP37.1 RN10.2 U2R9.2 U3H9.2
N$106: G=B18.2 IC10.6 JP39.1 RN10.6 U2R9.3 U3H9.3
N$107: G=B18.1 IC10.4 JP38.1 RN10.4 U2R9.1 U3H9.1
N$108: IC10.2 IC10.3 IC10.16 RN10.3
N$109: IC10.5 IC10.13 RN10.5
N$110: IC10.7 IC10.11 RN10.7
N$111: O11.2 SV52.2 SV55.2 U2R10.6 U3H10.6
N$112: SV51.2 TERM10.2 U2R10.5 U3H10.5
N$113: O11.4 SV51.4 SV52.4 SV55.4 TERM10.1
N$114: C1H10.1 C1R10.1 R11.2 U2R10.8 U3H10.8
N$115: 6=5V10.1 6=12V10.1 O11.6 SV55.6
N$116: IC11.1 JP41.1 RN11.2 U2R10.2 U3H10.2
N$117: G=B20.2 IC11.6 JP43.1 RN11.6 U2R10.3 U3H10.3
N$118: G=B20.1 IC11.4 JP42.1 RN11.4 U2R10.1 U3H10.1
N$119: IC11.2 IC11.3 IC11.16 RN11.3
N$120: IC11.5 IC11.13 RN11.5
N$121: IC11.7 IC11.11 RN11.7
N$122: O12.2 SV57.2 SV60.2 U2R11.6 U3H11.6
N$123: SV56.2 TERM11.2 U2R11.5 U3H11.5
N$124: O12.4 SV56.4 SV57.4 SV60.4 TERM11.1
N$125: C1H11.1 C1R11.1 R12.2 U2R11.8 U3H11.8
N$126: 6=5V11.1 6=12V11.1 O12.6 SV60.6
N$127: IC12.1 JP45.1 RN12.2 U2R11.2 U3H11.2
N$128: G=B22.2 IC12.6 JP47.1 RN12.6 U2R11.3 U3H11.3
N$129: G=B22.1 IC12.4 JP46.1 RN12.4 U2R11.1 U3H11.1
N$130: IC12.2 IC12.3 IC12.16 RN12.3
N$131: IC12.5 IC12.13 RN12.5
N$132: IC12.7 IC12.11 RN12.7
O1: IC1.14 IC1.15 J4.2 JP2.2
O2: G=B1.2 IC1.12 J1.2 JP3.2
O3: G=B1.1 IC1.10 J2.2 JP4.2
O4: IC2.14 IC2.15 J3.2 JP5.2
O5: G=B3.1 IC2.10 J6.2 JP7.2
O6: G=B3.2 IC2.12 J5.2 JP6.2
O7: IC3.14 IC3.15 J7.2 JP9.2
O8: G=B5.1 IC3.10 J9.2 JP11.2
O9: G=B5.2 IC3.12 J8.2 JP10.2
O10: IC4.14 IC4.15 J10.2 JP13.2
O11: G=B7.1 IC4.10 J12.2 JP15.2
O12: G=B7.2 IC4.12 J11.2 JP14.2
O13: IC5.14 IC5.15 J13.2 JP17.2
O14: G=B9.1 IC5.10 J15.2 JP19.2
O15: G=B9.2 IC5.12 J14.2 JP18.2
O16: IC6.14 IC6.15 J16.2 JP21.2
O17: G=B11.1 IC6.10 J18.2 JP23.2
O18: G=B11.2 IC6.12 J17.2 JP22.2
O19: IC7.14 IC7.15 J19.2 JP25.2
O20: G=B13.1 IC7.10 J21.2 JP27.2
O21: G=B13.2 IC7.12 J20.2 JP26.2
O22: IC8.14 IC8.15 J22.2 JP29.2
O23: G=B15.1 IC8.10 J24.2 JP31.2
O24: G=B15.2 IC8.12 J23.2 JP30.2
O25: IC9.14 IC9.15 J25.2 JP33.2
O26: G=B17.1 IC9.10 J27.2 JP35.2
O27: G=B17.2 IC9.12 J26.2 JP34.2
O28: IC10.14 IC10.15 J28.2 JP37.2
O29: G=B19.1 IC10.10 J30.2 JP39.2
O30: G=B19.2 IC10.12 J29.2 JP38.2
O31: IC11.14 IC11.15 J31.2 JP41.2
O32: G=B21.1 IC11.10 J33.2 JP43.2
O33: G=B21.2 IC11.12 J32.2 JP42.2
O34: IC12.14 IC12.15 J34.2 JP45.2
O35: G=B23.1 IC12.10 J36.2 JP47.2
O36: G=B23.2 IC12.12 J35.2 JP46.2

## Tracks (layer width: path | path; a pad name or v marks a point on that pad's centre or on a via)
12V
  Top 0.584: 45.96,14.35 45.14,14.35 IC1.9 | 45.96,9.46 45.96,6.84 45.98,6.82 45.98,5.75 J2.1 | 45.96,9.46 45.96,14.35 | 45.96,9.46 46.15,9.27 J1.1 | J4.1 45.96,14.35
  Top 0.813: SV1.1 21.03,11.97 19.63,10.57 19.63,6.33 20.25,5.71 20.25,3.44 21.03,2.66 SV6.1
  Bottom 0.152: 27.34,11.37 27.34,9.01 JP1.2
  Bottom 0.559: 20.18,14.16 18.99,12.97 8.12,12.97 8.11,12.95
  Bottom 0.584: 6=12V.2 4.81,13.14 5.13,12.83 7.98,12.83 8.11,12.95 | 20.18,14.16 SV1.1 22.24,12.95 25.08,12.95 26.67,11.37 27.34,11.37 45.44,11.37 J1.1
  pour Bottom: 48.49,15.18 4.36,15.18 4.05,14.86 4.05,12 25,12 28.81,8.19 48.49,8.19
12V1
  Top 0.584: 45.96,31.15 45.14,31.15 IC2.9 | 45.96,26.26 45.96,23.64 45.98,23.62 45.98,22.55 J6.1 | 45.96,26.26 45.96,31.15 | 45.96,26.26 46.15,26.07 J5.1 | J3.1 45.96,31.15
  Top 0.813: SV8.1 21.03,28.77 19.63,27.37 19.63,23.13 20.25,22.51 20.25,20.24 21.03,19.47 SV9.1
  Bottom 0.152: 27.34,28.17 27.34,25.81 JP8.2
  Bottom 0.559: 20.18,30.96 18.99,29.77 8.12,29.77 8.11,29.75
  Bottom 0.584: 6=12V1.2 4.81,29.94 5.13,29.63 7.98,29.63 8.11,29.75 | 20.18,30.96 SV8.1 22.24,29.75 25.08,29.75 26.67,28.17 27.34,28.17 45.44,28.17 J5.1
  pour Bottom: 48.49,31.98 4.36,31.98 4.05,31.66 4.05,28.8 25,28.8 28.81,24.99 48.49,24.99
12V2
  Top 0.584: 45.96,47.95 45.14,47.95 IC3.9 | 45.96,43.06 45.96,40.44 45.98,40.42 45.98,39.35 J9.1 | 45.96,43.06 45.96,47.95 | 45.96,43.06 46.15,42.87 J8.1 | J7.1 45.96,47.95
  Top 0.813: SV13.1 21.03,45.58 19.63,44.18 19.63,39.93 20.25,39.31 20.25,37.05 21.03,36.27 SV14.1
  Bottom 0.152: 27.34,44.97 27.34,42.61 JP12.2
  Bottom 0.559: 20.18,47.76 18.99,46.57 8.12,46.57 8.11,46.56
  Bottom 0.584: 6=12V2.2 4.81,46.74 5.13,46.43 7.98,46.43 8.11,46.56 | 20.18,47.76 SV13.1 22.24,46.56 25.08,46.56 26.67,44.97 27.34,44.97 45.44,44.97 J8.1
  pour Bottom: 48.49,48.78 4.36,48.78 4.05,48.46 4.05,45.6 25,45.6 28.81,41.79 48.49,41.79
12V3
  Top 0.584: 45.96,64.75 45.14,64.75 IC4.9 | 45.96,59.86 45.96,57.25 45.98,57.22 45.98,56.15 J12.1 | 45.96,59.86 45.96,64.75 | 45.96,59.86 46.15,59.67 J11.1 | J10.1 45.96,64.75
  Top 0.813: SV18.1 21.03,62.38 19.63,60.98 19.63,56.73 20.25,56.11 20.25,53.85 21.03,53.07 SV19.1
  Bottom 0.152: 27.34,61.77 27.34,59.41 JP16.2
  Bottom 0.559: 20.18,64.56 18.99,63.37 8.12,63.37 8.11,63.36
  Bottom 0.584: 6=12V3.2 4.81,63.54 5.13,63.23 7.98,63.23 8.11,63.36 | 20.18,64.56 SV18.1 22.24,63.36 25.08,63.36 26.67,61.77 27.34,61.77 45.44,61.77 J11.1
  pour Bottom: 48.49,65.58 4.36,65.58 4.05,65.26 4.05,62.4 25,62.4 28.81,58.59 48.49,58.59
12V4
  Top 0.584: 45.96,81.55 45.14,81.55 IC5.9 | 45.96,76.66 45.96,74.05 45.98,74.02 45.98,72.95 J15.1 | 45.96,76.66 45.96,81.55 | 45.96,76.66 46.15,76.47 J14.1 | J13.1 45.96,81.55
  Top 0.813: SV23.1 21.03,79.18 19.63,77.78 19.63,73.54 20.25,72.91 20.25,70.65 21.03,69.87 SV24.1
  Bottom 0.152: 27.34,78.57 27.34,76.21 JP20.2
  Bottom 0.559: 20.18,81.36 18.99,80.17 8.12,80.17 8.11,80.16
  Bottom 0.584: 6=12V4.2 4.81,80.34 5.13,80.03 7.98,80.03 8.11,80.16 | 20.18,81.36 SV23.1 22.24,80.16 25.08,80.16 26.67,78.57 27.34,78.57 45.44,78.57 J14.1
  pour Bottom: 48.49,82.38 4.36,82.38 4.05,82.06 4.05,79.2 25,79.2 28.81,75.39 48.49,75.39
12V5
  Top 0.584: 45.96,98.36 45.14,98.36 IC6.9 | 45.96,93.47 45.96,90.85 45.98,90.82 45.98,89.75 J18.1 | 45.96,93.47 45.96,98.36 | 45.96,93.47 46.15,93.28 J17.1 | J16.1 45.96,98.36
  Top 0.813: SV28.1 21.03,95.98 19.63,94.58 19.63,90.34 20.25,89.71 20.25,87.45 21.03,86.67 SV29.1
  Bottom 0.152: 27.34,95.37 27.34,93.01 JP24.2
  Bottom 0.559: 20.18,98.17 18.99,96.97 8.12,96.97 8.11,96.96
  Bottom 0.584: 6=12V5.2 4.81,97.14 5.13,96.83 7.98,96.83 8.11,96.96 | 20.18,98.17 SV28.1 22.24,96.96 25.08,96.96 26.67,95.37 27.34,95.37 45.44,95.37 J17.1
  pour Bottom: 48.49,99.18 4.36,99.18 4.05,98.86 4.05,96.01 25,96.01 28.81,92.2 48.49,92.2
12V6
  Top 0.584: 96.35,14.35 95.54,14.35 IC7.9 | 96.35,9.46 96.35,6.84 96.38,6.82 96.38,5.75 J21.1 | 96.35,9.46 96.35,14.35 | 96.35,9.46 96.54,9.27 J20.1 | J19.1 96.35,14.35
  Top 0.813: SV33.1 71.43,11.97 70.03,10.57 70.03,6.33 70.65,5.71 70.65,3.44 71.43,2.66 SV34.1
  Bottom 0.152: 77.74,11.37 77.74,9.01 JP28.2
  Bottom 0.559: 70.58,14.16 69.38,12.97 58.52,12.97 58.51,12.95
  Bottom 0.584: 6=12V6.2 55.21,13.14 55.52,12.83 58.38,12.83 58.51,12.95 | 70.58,14.16 SV33.1 72.64,12.95 75.48,12.95 77.07,11.37 77.74,11.37 95.84,11.37 J20.1
  pour Bottom: 98.89,15.18 54.76,15.18 54.44,14.86 54.44,12 75.4,12 79.21,8.19 98.89,8.19
12V7
  Top 0.584: 96.35,31.15 95.54,31.15 IC8.9 | 96.35,26.26 96.35,23.64 96.38,23.62 96.38,22.55 J24.1 | 96.35,26.26 96.35,31.15 | 96.35,26.26 96.54,26.07 J23.1 | J22.1 96.35,31.15
  Top 0.813: SV38.1 71.43,28.77 70.03,27.37 70.03,23.13 70.65,22.51 70.65,20.24 71.43,19.47 SV39.1
  Bottom 0.152: 77.74,28.17 77.74,25.81 JP32.2
  Bottom 0.559: 70.58,30.96 69.38,29.77 58.52,29.77 58.51,29.75
  Bottom 0.584: 6=12V7.2 55.21,29.94 55.52,29.63 58.38,29.63 58.51,29.75 | 70.58,30.96 SV38.1 72.64,29.75 75.48,29.75 77.07,28.17 77.74,28.17 95.84,28.17 J23.1
  pour Bottom: 98.89,31.98 54.76,31.98 54.44,31.66 54.44,28.8 75.4,28.8 79.21,24.99 98.89,24.99
12V8
  Top 0.584: 96.35,47.95 95.54,47.95 IC9.9 | 96.35,43.06 96.35,40.44 96.38,40.42 96.38,39.35 J27.1 | 96.35,43.06 96.35,47.95 | 96.35,43.06 96.54,42.87 J26.1 | J25.1 96.35,47.95
  Top 0.813: SV43.1 71.43,45.58 70.03,44.18 70.03,39.93 70.65,39.31 70.65,37.05 71.43,36.27 SV44.1
  Bottom 0.152: 77.74,44.97 77.74,42.61 JP36.2
  Bottom 0.559: 70.58,47.76 69.38,46.57 58.52,46.57 58.51,46.56
  Bottom 0.584: 6=12V8.2 55.21,46.74 55.52,46.43 58.38,46.43 58.51,46.56 | 70.58,47.76 SV43.1 72.64,46.56 75.48,46.56 77.07,44.97 77.74,44.97 95.84,44.97 J26.1
  pour Bottom: 98.89,48.78 54.76,48.78 54.44,48.46 54.44,45.6 75.4,45.6 79.21,41.79 98.89,41.79
12V9
  Top 0.584: 96.35,64.75 95.54,64.75 IC10.9 | 96.35,59.86 96.35,57.25 96.38,57.22 96.38,56.15 J30.1 | 96.35,59.86 96.35,64.75 | 96.35,59.86 96.54,59.67 J29.1 | J28.1 96.35,64.75
  Top 0.813: SV48.1 71.43,62.38 70.03,60.98 70.03,56.73 70.65,56.11 70.65,53.85 71.43,53.07 SV49.1
  Bottom 0.152: 77.74,61.77 77.74,59.41 JP40.2
  Bottom 0.559: 70.58,64.56 69.38,63.37 58.52,63.37 58.51,63.36
  Bottom 0.584: 6=12V9.2 55.21,63.54 55.52,63.23 58.38,63.23 58.51,63.36 | 70.58,64.56 SV48.1 72.64,63.36 75.48,63.36 77.07,61.77 77.74,61.77 95.84,61.77 J29.1
  pour Bottom: 98.89,65.58 54.76,65.58 54.44,65.26 54.44,62.4 75.4,62.4 79.21,58.59 98.89,58.59
12V10
  Top 0.584: 96.35,81.55 95.54,81.55 IC11.9 | 96.35,76.66 96.35,74.05 96.38,74.02 96.38,72.95 J33.1 | 96.35,76.66 96.35,81.55 | 96.35,76.66 96.54,76.47 J32.1 | J31.1 96.35,81.55
  Top 0.813: SV53.1 71.43,79.18 70.03,77.78 70.03,73.54 70.65,72.91 70.65,70.65 71.43,69.87 SV54.1
  Bottom 0.152: 77.74,78.57 77.74,76.21 JP44.2
  Bottom 0.559: 70.58,81.36 69.38,80.17 58.52,80.17 58.51,80.16
  Bottom 0.584: 6=12V10.2 55.21,80.34 55.52,80.03 58.38,80.03 58.51,80.16 | 70.58,81.36 SV53.1 72.64,80.16 75.48,80.16 77.07,78.57 77.74,78.57 95.84,78.57 J32.1
  pour Bottom: 98.89,82.38 54.76,82.38 54.44,82.06 54.44,79.2 75.4,79.2 79.21,75.39 98.89,75.39
12V11
  Top 0.584: 96.35,98.36 95.54,98.36 IC12.9 | 96.35,93.47 96.35,90.85 96.38,90.82 96.38,89.75 J36.1 | 96.35,93.47 96.35,98.36 | 96.35,93.47 96.54,93.28 J35.1 | J34.1 96.35,98.36
  Top 0.813: SV58.1 71.43,95.98 70.03,94.58 70.03,90.34 70.65,89.71 70.65,87.45 71.43,86.67 SV59.1
  Bottom 0.152: 77.74,95.37 77.74,93.01 JP48.2
  Bottom 0.559: 70.58,98.17 69.38,96.97 58.52,96.97 58.51,96.96
  Bottom 0.584: 6=12V11.2 55.21,97.14 55.52,96.83 58.38,96.83 58.51,96.96 | 70.58,98.17 SV58.1 72.64,96.96 75.48,96.96 77.07,95.37 77.74,95.37 95.84,95.37 J35.1
  pour Bottom: 98.89,99.18 54.76,99.18 54.44,98.86 54.44,96.01 75.4,96.01 79.21,92.2 98.89,92.2
+5V  (via drill 0.35)
  Top 0.254: v26.68,3.75 26.68,4.45 25.8,5.33 | 25.8,5.33 25.8,7.24 26.22,7.65 v26.22,8.93 26.18,8.93 R1.1 | 25.8,5.33 25.59,5.12 24.85,5.12 24.19,4.46 24.19,3.84 23.23,2.88 22.31,2.88 21.36,3.83 v21.19,3.83
  Top 0.584: 7.22,5.02 7.22,6.72 7.51,7 7.51,10.79 SV3.1 | 7.22,5.02 7.22,3.75 9.12,1.84 SV4.1 | O1.1 7.22,5.02
  Bottom 0.152: v26.22,8.93 26.36,8.79 26.36,8.55 26.85,8.06 JP1.1
  Bottom 0.305: RN1.1 v26.68,3.75
  Bottom 0.406: v21.19,3.83 21,3.83 19.14,5.69 19.14,6.72 18.86,7.01 16.76,7.01 16.56,6.8 16.56,6.31 14.53,4.28 14.53,3.66 13.87,3.01 12.81,3.01 12.48,2.68 11.71,2.68 SV4.1
  Bottom 0.559: O1.1 4.85,3.69 3.41,3.69 3.41,2.48 | 6=5V.2 3.41,2.48 | 3.41,2.48 2.57,1.64 SV2.1
  pour Top: 12.3,15.18 12.3,13.27 9.12,10.1 9.12,3.75 10.08,2.79 11.66,2.79 11.66,0.25 0.23,0.25 0.23,4.7 1.19,5.65 6.27,5.65 6.59,5.97 6.59,12 8.49,13.9 8.49,14.54 9.12,15.18
+5V1  (via drill 0.35)
  Top 0.254: v26.68,20.55 26.68,21.25 25.8,22.13 | 25.8,22.13 25.8,24.04 26.22,24.46 v26.22,25.73 26.18,25.73 R2.1 | 25.8,22.13 25.59,21.92 24.85,21.92 24.19,21.26 24.19,20.64 23.23,19.68 22.31,19.68 21.36,20.63 v21.19,20.63
  Top 0.584: 7.22,21.82 7.22,23.52 7.51,23.8 7.51,27.6 SV5.1 | 7.22,21.82 7.22,20.55 9.12,18.64 SV7.1 | O2.1 7.22,21.82
  Bottom 0.152: v26.22,25.73 26.36,25.59 26.36,25.35 26.85,24.86 JP8.1
  Bottom 0.305: RN2.1 v26.68,20.55
  Bottom 0.406: v21.19,20.63 21,20.63 19.14,22.49 19.14,23.52 18.86,23.81 16.76,23.81 16.56,23.6 16.56,23.11 14.53,21.09 14.53,20.46 13.87,19.81 12.81,19.81 12.48,19.48 11.71,19.48 SV7.1
  Bottom 0.559: O2.1 4.85,20.5 3.41,20.5 3.41,19.28 | 6=5V1.2 3.41,19.28 | 3.41,19.28 2.57,18.44 SV10.1
  pour Top: 12.3,31.98 12.3,30.07 9.12,26.9 9.12,20.55 10.08,19.59 11.66,19.59 11.66,17.05 0.23,17.05 0.23,21.5 1.19,22.45 6.27,22.45 6.59,22.77 6.59,28.8 8.49,30.71 8.49,31.34 9.12,31.98
+5V2  (via drill 0.35)
  Top 0.254: v26.68,37.35 26.68,38.05 25.8,38.93 | 25.8,38.93 25.8,40.84 26.22,41.26 v26.22,42.53 26.18,42.53 R3.1 | 25.8,38.93 25.59,38.72 24.85,38.72 24.19,38.06 24.19,37.44 23.23,36.48 22.31,36.48 21.36,37.43 v21.19,37.43
  Top 0.584: 7.22,38.62 7.22,40.32 7.51,40.61 7.51,44.4 SV11.1 | 7.22,38.62 7.22,37.35 9.12,35.44 SV12.1 | O3.1 7.22,38.62
  Bottom 0.152: v26.22,42.53 26.36,42.39 26.36,42.15 26.85,41.66 JP12.1
  Bottom 0.305: RN3.1 v26.68,37.35
  Bottom 0.406: v21.19,37.43 21,37.43 19.14,39.29 19.14,40.32 18.86,40.61 16.76,40.61 16.56,40.4 16.56,39.91 14.53,37.89 14.53,37.27 13.87,36.61 12.81,36.61 12.48,36.28 11.71,36.28 SV12.1
  Bottom 0.559: O3.1 4.85,37.3 3.41,37.3 3.41,36.08 | 6=5V2.2 3.41,36.08 | 3.41,36.08 2.57,35.24 SV15.1
  pour Top: 12.3,48.78 12.3,46.87 9.12,43.7 9.12,37.35 10.08,36.39 11.66,36.39 11.66,33.85 0.23,33.85 0.23,38.3 1.19,39.25 6.27,39.25 6.59,39.57 6.59,45.6 8.49,47.51 8.49,48.14 9.12,48.78
+5V3  (via drill 0.35)
  Top 0.254: v26.68,54.15 26.68,54.85 25.8,55.73 | 25.8,55.73 25.8,57.64 26.22,58.06 v26.22,59.34 26.18,59.34 R4.1 | 25.8,55.73 25.59,55.52 24.85,55.52 24.19,54.87 24.19,54.24 23.23,53.28 22.31,53.28 21.36,54.23 v21.19,54.23
  Top 0.584: 7.22,55.42 7.22,57.12 7.51,57.41 7.51,61.2 SV16.1 | 7.22,55.42 7.22,54.15 9.12,52.24 SV17.1 | O4.1 7.22,55.42
  Bottom 0.152: v26.22,59.34 26.36,59.19 26.36,58.95 26.85,58.46 JP16.1
  Bottom 0.305: RN4.1 v26.68,54.15
  Bottom 0.406: v21.19,54.23 21,54.23 19.14,56.09 19.14,57.12 18.86,57.41 16.76,57.41 16.56,57.2 16.56,56.72 14.53,54.69 14.53,54.07 13.87,53.41 12.81,53.41 12.48,53.08 11.71,53.08 SV17.1
  Bottom 0.559: O4.1 4.85,54.1 3.41,54.1 3.41,52.88 | 6=5V3.2 3.41,52.88 | 3.41,52.88 2.57,52.04 SV20.1
  pour Top: 12.3,65.58 12.3,63.67 9.12,60.5 9.12,54.15 10.08,53.2 11.66,53.2 11.66,50.66 0.23,50.66 0.23,55.1 1.19,56.05 6.27,56.05 6.59,56.37 6.59,62.4 8.49,64.31 8.49,64.94 9.12,65.58
+5V4  (via drill 0.35)
  Top 0.254: v26.68,70.95 26.68,71.66 25.8,72.54 | 25.8,72.54 25.8,74.44 26.22,74.86 v26.22,76.14 26.18,76.14 R5.1 | 25.8,72.54 25.59,72.32 24.85,72.32 24.19,71.67 24.19,71.05 23.23,70.09 22.31,70.09 21.36,71.04 v21.19,71.04
  Top 0.584: 7.22,72.22 7.22,73.92 7.51,74.21 7.51,78 SV21.1 | 7.22,72.22 7.22,70.95 9.12,69.04 SV22.1 | O5.1 7.22,72.22
  Bottom 0.152: v26.22,76.14 26.36,75.99 26.36,75.75 26.85,75.26 JP20.1
  Bottom 0.305: RN5.1 v26.68,70.95
  Bottom 0.406: v21.19,71.04 21,71.04 19.14,72.89 19.14,73.93 18.86,74.21 16.76,74.21 16.56,74 16.56,73.52 14.53,71.49 14.53,70.87 13.87,70.21 12.81,70.21 12.48,69.88 11.71,69.88 SV22.1
  Bottom 0.559: O5.1 4.85,70.9 3.41,70.9 3.41,69.68 | 6=5V4.2 3.41,69.68 | 3.41,69.68 2.57,68.84 SV25.1
  pour Top: 12.3,82.38 12.3,80.47 9.12,77.3 9.12,70.95 10.08,70 11.66,70 11.66,67.46 0.23,67.46 0.23,71.9 1.19,72.85 6.27,72.85 6.59,73.17 6.59,79.2 8.49,81.11 8.49,81.74 9.12,82.38
+5V5  (via drill 0.35)
  Top 0.254: v26.68,87.75 26.68,88.46 25.8,89.34 | 25.8,89.34 25.8,91.24 26.22,91.66 v26.22,92.94 26.18,92.94 R6.1 | 25.8,89.34 25.59,89.12 24.85,89.12 24.19,88.47 24.19,87.85 23.23,86.89 22.31,86.89 21.36,87.84 v21.19,87.84
  Top 0.584: 7.22,89.02 7.22,90.72 7.51,91.01 7.51,94.8 SV26.1 | 7.22,89.02 7.22,87.75 9.12,85.85 SV27.1 | O6.1 7.22,89.02
  Bottom 0.152: v26.22,92.94 26.36,92.79 26.36,92.55 26.85,92.06 JP24.1
  Bottom 0.305: RN6.1 v26.68,87.75
  Bottom 0.406: v21.19,87.84 21,87.84 19.14,89.69 19.14,90.73 18.86,91.01 16.76,91.01 16.56,90.8 16.56,90.32 14.53,88.29 14.53,87.67 13.87,87.01 12.81,87.01 12.48,86.68 11.71,86.68 SV27.1
  Bottom 0.559: O6.1 4.85,87.7 3.41,87.7 3.41,86.48 | 6=5V5.2 3.41,86.48 | 3.41,86.48 2.57,85.64 SV30.1
  pour Top: 12.3,99.18 12.3,97.28 9.12,94.1 9.12,87.75 10.08,86.8 11.66,86.8 11.66,84.26 0.23,84.26 0.23,88.7 1.19,89.66 6.27,89.66 6.59,89.97 6.59,96.01 8.49,97.91 8.49,98.55 9.12,99.18
+5V6  (via drill 0.35)
  Top 0.254: v77.08,3.75 77.08,4.45 76.2,5.33 | 76.2,5.33 76.2,7.24 76.61,7.65 v76.61,8.93 76.57,8.93 R7.1 | 76.2,5.33 75.98,5.12 75.25,5.12 74.59,4.46 74.59,3.84 73.63,2.88 72.71,2.88 71.76,3.83 v71.59,3.83
  Top 0.584: 57.62,5.02 57.62,6.72 57.9,7 57.9,10.79 SV31.1 | 57.62,5.02 57.62,3.75 59.52,1.84 SV32.1 | O7.1 57.62,5.02
  Bottom 0.152: v76.61,8.93 76.76,8.79 76.76,8.55 77.25,8.06 JP28.1
  Bottom 0.305: RN7.1 v77.08,3.75
  Bottom 0.406: v71.59,3.83 71.4,3.83 69.54,5.69 69.54,6.72 69.26,7.01 67.16,7.01 66.95,6.8 66.95,6.31 64.93,4.28 64.93,3.66 64.27,3.01 63.21,3.01 62.88,2.68 62.11,2.68 SV32.1
  Bottom 0.559: O7.1 55.25,3.69 53.81,3.69 53.81,2.48 | 6=5V6.2 53.81,2.48 | 53.81,2.48 52.97,1.64 SV35.1
  pour Top: 62.7,15.18 62.7,13.27 59.52,10.1 59.52,3.75 60.48,2.79 62.06,2.79 62.06,0.25 50.63,0.25 50.63,4.7 51.59,5.65 56.67,5.65 56.98,5.97 56.98,12 58.89,13.9 58.89,14.54 59.52,15.18
+5V7  (via drill 0.35)
  Top 0.254: v77.08,20.55 77.08,21.25 76.2,22.13 | 76.2,22.13 76.2,24.04 76.61,24.46 v76.61,25.73 76.57,25.73 R8.1 | 76.2,22.13 75.98,21.92 75.25,21.92 74.59,21.26 74.59,20.64 73.63,19.68 72.71,19.68 71.76,20.63 v71.59,20.63
  Top 0.584: 57.62,21.82 57.62,23.52 57.9,23.8 57.9,27.6 SV36.1 | 57.62,21.82 57.62,20.55 59.52,18.64 SV37.1 | O8.1 57.62,21.82
  Bottom 0.152: v76.61,25.73 76.76,25.59 76.76,25.35 77.25,24.86 JP32.1
  Bottom 0.305: RN8.1 v77.08,20.55
  Bottom 0.406: v71.59,20.63 71.4,20.63 69.54,22.49 69.54,23.52 69.26,23.81 67.16,23.81 66.95,23.6 66.95,23.11 64.93,21.09 64.93,20.46 64.27,19.81 63.21,19.81 62.88,19.48 62.11,19.48 SV37.1
  Bottom 0.559: O8.1 55.25,20.5 53.81,20.5 53.81,19.28 | 6=5V7.2 53.81,19.28 | 53.81,19.28 52.97,18.44 SV40.1
  pour Top: 62.7,31.98 62.7,30.07 59.52,26.9 59.52,20.55 60.48,19.59 62.06,19.59 62.06,17.05 50.63,17.05 50.63,21.5 51.59,22.45 56.67,22.45 56.98,22.77 56.98,28.8 58.89,30.71 58.89,31.34 59.52,31.98
+5V8  (via drill 0.35)
  Top 0.254: v77.08,37.35 77.08,38.05 76.2,38.93 | 76.2,38.93 76.2,40.84 76.61,41.26 v76.61,42.53 76.57,42.53 R9.1 | 76.2,38.93 75.98,38.72 75.25,38.72 74.59,38.06 74.59,37.44 73.63,36.48 72.71,36.48 71.76,37.43 v71.59,37.43
  Top 0.584: 57.62,38.62 57.62,40.32 57.9,40.61 57.9,44.4 SV41.1 | 57.62,38.62 57.62,37.35 59.52,35.44 SV42.1 | O9.1 57.62,38.62
  Bottom 0.152: v76.61,42.53 76.76,42.39 76.76,42.15 77.25,41.66 JP36.1
  Bottom 0.305: RN9.1 v77.08,37.35
  Bottom 0.406: v71.59,37.43 71.4,37.43 69.54,39.29 69.54,40.32 69.26,40.61 67.16,40.61 66.95,40.4 66.95,39.91 64.93,37.89 64.93,37.27 64.27,36.61 63.21,36.61 62.88,36.28 62.11,36.28 SV42.1
  Bottom 0.559: O9.1 55.25,37.3 53.81,37.3 53.81,36.08 | 6=5V8.2 53.81,36.08 | 53.81,36.08 52.97,35.24 SV45.1
  pour Top: 62.7,48.78 62.7,46.87 59.52,43.7 59.52,37.35 60.48,36.39 62.06,36.39 62.06,33.85 50.63,33.85 50.63,38.3 51.59,39.25 56.67,39.25 56.98,39.57 56.98,45.6 58.89,47.51 58.89,48.14 59.52,48.78
+5V9  (via drill 0.35)
  Top 0.254: v77.08,54.15 77.08,54.85 76.2,55.73 | 76.2,55.73 76.2,57.64 76.61,58.06 v76.61,59.34 76.57,59.34 R10.1 | 76.2,55.73 75.98,55.52 75.25,55.52 74.59,54.87 74.59,54.24 73.63,53.28 72.71,53.28 71.76,54.23 v71.59,54.23
  Top 0.584: 57.62,55.42 57.62,57.12 57.9,57.41 57.9,61.2 SV46.1 | 57.62,55.42 57.62,54.15 59.52,52.24 SV47.1 | O10.1 57.62,55.42
  Bottom 0.152: v76.61,59.34 76.76,59.19 76.76,58.95 77.25,58.46 JP40.1
  Bottom 0.305: RN10.1 v77.08,54.15
  Bottom 0.406: v71.59,54.23 71.4,54.23 69.54,56.09 69.54,57.12 69.26,57.41 67.16,57.41 66.95,57.2 66.95,56.72 64.93,54.69 64.93,54.07 64.27,53.41 63.21,53.41 62.88,53.08 62.11,53.08 SV47.1
  Bottom 0.559: O10.1 55.25,54.1 53.81,54.1 53.81,52.88 | 6=5V9.2 53.81,52.88 | 53.81,52.88 52.97,52.04 SV50.1
  pour Top: 62.7,65.58 62.7,63.67 59.52,60.5 59.52,54.15 60.48,53.2 62.06,53.2 62.06,50.66 50.63,50.66 50.63,55.1 51.59,56.05 56.67,56.05 56.98,56.37 56.98,62.4 58.89,64.31 58.89,64.94 59.52,65.58
+5V10  (via drill 0.35)
  Top 0.254: v77.08,70.95 77.08,71.66 76.2,72.54 | 76.2,72.54 76.2,74.44 76.61,74.86 v76.61,76.14 76.57,76.14 R11.1 | 76.2,72.54 75.98,72.32 75.25,72.32 74.59,71.67 74.59,71.05 73.63,70.09 72.71,70.09 71.76,71.04 v71.59,71.04
  Top 0.584: 57.62,72.22 57.62,73.92 57.9,74.21 57.9,78 SV51.1 | 57.62,72.22 57.62,70.95 59.52,69.04 SV52.1 | O11.1 57.62,72.22
  Bottom 0.152: v76.61,76.14 76.76,75.99 76.76,75.75 77.25,75.26 JP44.1
  Bottom 0.305: RN11.1 v77.08,70.95
  Bottom 0.406: v71.59,71.04 71.4,71.04 69.54,72.89 69.54,73.93 69.26,74.21 67.16,74.21 66.95,74 66.95,73.52 64.93,71.49 64.93,70.87 64.27,70.21 63.21,70.21 62.88,69.88 62.11,69.88 SV52.1
  Bottom 0.559: O11.1 55.25,70.9 53.81,70.9 53.81,69.68 | 6=5V10.2 53.81,69.68 | 53.81,69.68 52.97,68.84 SV55.1
  pour Top: 62.7,82.38 62.7,80.47 59.52,77.3 59.52,70.95 60.48,70 62.06,70 62.06,67.46 50.63,67.46 50.63,71.9 51.59,72.85 56.67,72.85 56.98,73.17 56.98,79.2 58.89,81.11 58.89,81.74 59.52,82.38
+5V11  (via drill 0.35)
  Top 0.254: v77.08,87.75 77.08,88.46 76.2,89.34 | 76.2,89.34 76.2,91.24 76.61,91.66 v76.61,92.94 76.57,92.94 R12.1 | 76.2,89.34 75.98,89.12 75.25,89.12 74.59,88.47 74.59,87.85 73.63,86.89 72.71,86.89 71.76,87.84 v71.59,87.84
  Top 0.584: 57.62,89.02 57.62,90.72 57.9,91.01 57.9,94.8 SV56.1 | 57.62,89.02 57.62,87.75 59.52,85.85 SV57.1 | O12.1 57.62,89.02
  Bottom 0.152: v76.61,92.94 76.76,92.79 76.76,92.55 77.25,92.06 JP48.1
  Bottom 0.305: RN12.1 v77.08,87.75
  Bottom 0.406: v71.59,87.84 71.4,87.84 69.54,89.69 69.54,90.73 69.26,91.01 67.16,91.01 66.95,90.8 66.95,90.32 64.93,88.29 64.93,87.67 64.27,87.01 63.21,87.01 62.88,86.68 62.11,86.68 SV57.1
  Bottom 0.559: O12.1 55.25,87.7 53.81,87.7 53.81,86.48 | 6=5V11.2 53.81,86.48 | 53.81,86.48 52.97,85.64 SV60.1
  pour Top: 62.7,99.18 62.7,97.28 59.52,94.1 59.52,87.75 60.48,86.8 62.06,86.8 62.06,84.26 50.63,84.26 50.63,88.7 51.59,89.66 56.67,89.66 56.98,89.97 56.98,96.01 58.89,97.91 58.89,98.55 59.52,99.18
GND  (via drill 0.35)
  Top 0.152: 15.88,14.05 SV3.3
  Top 0.508: SV1.2 28.21,9.52 28.21,3.94 SV6.3
  Top 0.559: 15.88,14.05 14.61,12.77 14.61,11.25 13.27,9.92 11.41,9.92 10.31,8.83 9.76,8.83 8.93,9.65 v8.93,10.83 | U2R.4 17.89,4.73 17.89,9.99 17.15,10.73 17.15,12.24 15.95,13.43 SV3.3
  Top 0.584: SV2.5 2.15,11.43 4.18,11.43 5.52,10.1 O1.5
  Bottom 0.33: U2R.4 19.56,3.06 22.06,3.06 23.28,1.84 SV6.2
  Bottom 0.406: 6.17,8.83 3,8.83 1.78,7.6 SV2.3
  Bottom 0.508: IC1.8 44.7,5.51 43.45,4.26 43.45,2.51 42.78,1.84
  Bottom 0.559: O1.3 6.17,8.83 O1.5 6.9,10.83 v8.93,10.83 U3H.4 | C1H.2 18.49,5.27 U2R.4 18.01,3.64 18.01,3.53 16.31,1.84 SV4.3
  Bottom 0.584: 42.78,1.84 SV6.3 25.32,1.84 | 25.32,1.84 SV6.2 | C1R.2 25.31,1.85 25.32,1.84
  pour Bottom: 48.49,0.57 0.55,0.57 0.55,15.18 3.09,15.18 3.09,12.32 3.73,11.68 24.68,11.68 28.49,7.87 48.49,7.87
  pour Top: 0.87,6.29 5.95,6.29 5.95,11.36 5.95,12.64 7.86,14.54 7.22,15.18 0.23,15.18 0.23,6.92
  pour Top: 12.62,0.57 48.49,0.57 49.13,1.21 49.13,15.18 13.25,15.18 12.94,14.86 12.94,12.95 9.76,9.78 9.76,9.14 9.76,4.38 10.08,4.06 10.71,3.43 12.3,3.43 12.62,3.11 12.62,2.79
GND1  (via drill 0.35)
  Top 0.152: 15.88,30.85 SV5.3
  Top 0.508: SV8.2 28.21,26.32 28.21,20.74 SV9.3
  Top 0.559: 15.88,30.85 14.61,29.57 14.61,28.05 13.27,26.72 11.41,26.72 10.31,25.63 9.76,25.63 8.93,26.45 v8.93,27.63 | U2R1.4 17.89,21.53 17.89,26.79 17.15,27.53 17.15,29.04 15.95,30.24 SV5.3
  Top 0.584: SV10.5 2.15,28.23 4.18,28.23 5.52,26.9 O2.5
  Bottom 0.33: U2R1.4 19.56,19.86 22.06,19.86 23.28,18.64 SV9.2
  Bottom 0.406: 6.17,25.63 3,25.63 1.78,24.41 SV10.3
  Bottom 0.508: IC2.8 44.7,22.31 43.45,21.06 43.45,19.31 42.78,18.64
  Bottom 0.559: O2.3 6.17,25.63 O2.5 6.9,27.63 v8.93,27.63 U3H1.4 | C1H1.2 18.49,22.07 U2R1.4 18.01,20.44 18.01,20.34 16.31,18.64 SV7.3
  Bottom 0.584: 42.78,18.64 SV9.3 25.32,18.64 | 25.32,18.64 SV9.2 | C1R1.2 25.31,18.65 25.32,18.64
  pour Bottom: 48.49,17.37 0.55,17.37 0.55,31.98 3.09,31.98 3.09,29.12 3.73,28.48 24.68,28.48 28.49,24.67 48.49,24.67
  pour Top: 0.87,23.09 5.95,23.09 5.95,28.17 5.95,29.44 7.86,31.34 7.22,31.98 0.23,31.98 0.23,23.72
  pour Top: 12.62,17.37 48.49,17.37 49.13,18.01 49.13,31.98 13.25,31.98 12.94,31.66 12.94,29.75 9.76,26.58 9.76,25.94 9.76,21.18 10.08,20.86 10.71,20.23 12.3,20.23 12.62,19.91 12.62,19.59
GND2  (via drill 0.35)
  Top 0.152: 15.88,47.65 SV11.3
  Top 0.508: SV13.2 28.21,43.12 28.21,37.54 SV14.3
  Top 0.559: 15.88,47.65 14.61,46.37 14.61,44.85 13.27,43.52 11.41,43.52 10.31,42.43 9.76,42.43 8.93,43.25 v8.93,44.43 | U2R2.4 17.89,38.33 17.89,43.59 17.15,44.33 17.15,45.84 15.95,47.04 SV11.3
  Top 0.584: SV15.5 2.15,45.03 4.18,45.03 5.52,43.7 O3.5
  Bottom 0.33: U2R2.4 19.56,36.66 22.06,36.66 23.28,35.44 SV14.2
  Bottom 0.406: 6.17,42.43 3,42.43 1.78,41.21 SV15.3
  Bottom 0.508: IC3.8 44.7,39.11 43.45,37.86 43.45,36.12 42.78,35.44
  Bottom 0.559: O3.3 6.17,42.43 O3.5 6.9,44.43 v8.93,44.43 U3H2.4 | C1H2.2 18.49,38.87 U2R2.4 18.01,37.25 18.01,37.14 16.31,35.44 SV12.3
  Bottom 0.584: 42.78,35.44 SV14.3 25.32,35.44 | 25.32,35.44 SV14.2 | C1R2.2 25.31,35.45 25.32,35.44